# Altium PCB DistanceSensor.PcbDoc
Units mm, origin at the board's own origin, x right, y up, seen from the top; angles counter-clockwise.
Board outline 19 x 23 mm, 4 copper layers (L1 Top, L2 Ground, L3 Power, L4 Bottom), stack 1.576 mm thick; 21 components, 21 nets, 72 pads, 37 vias.
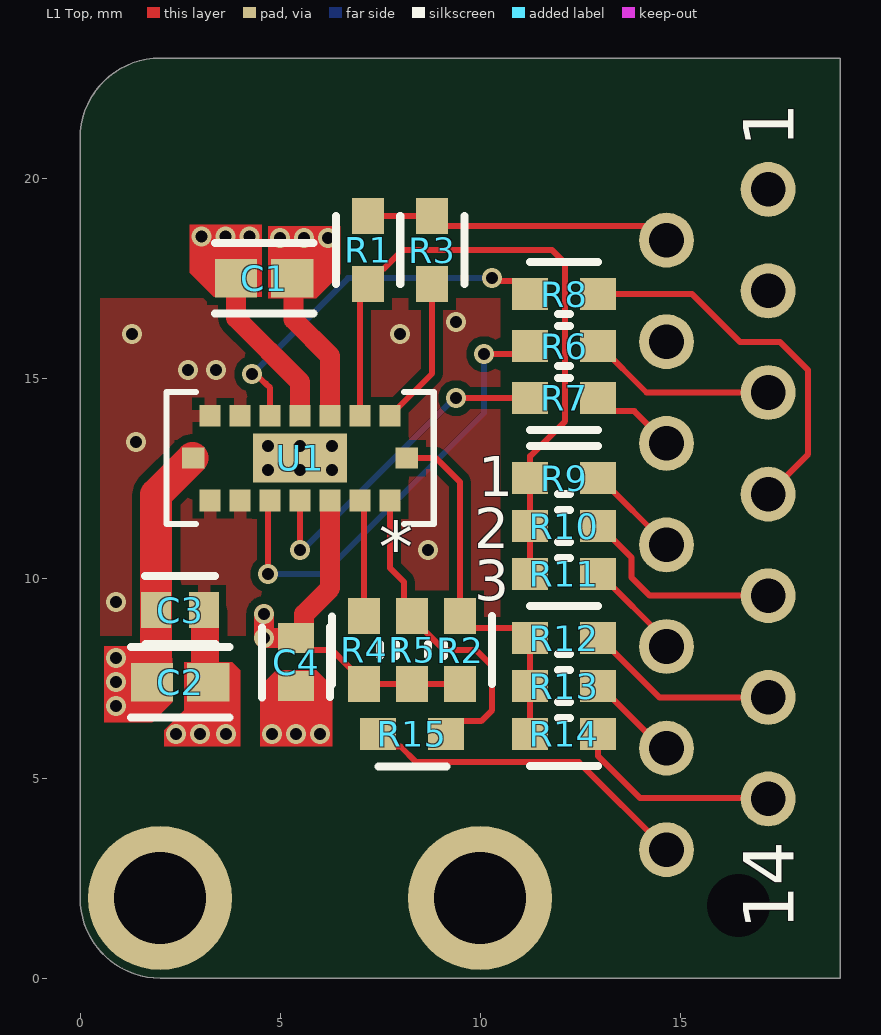
[diagram p0: L1 Top view]
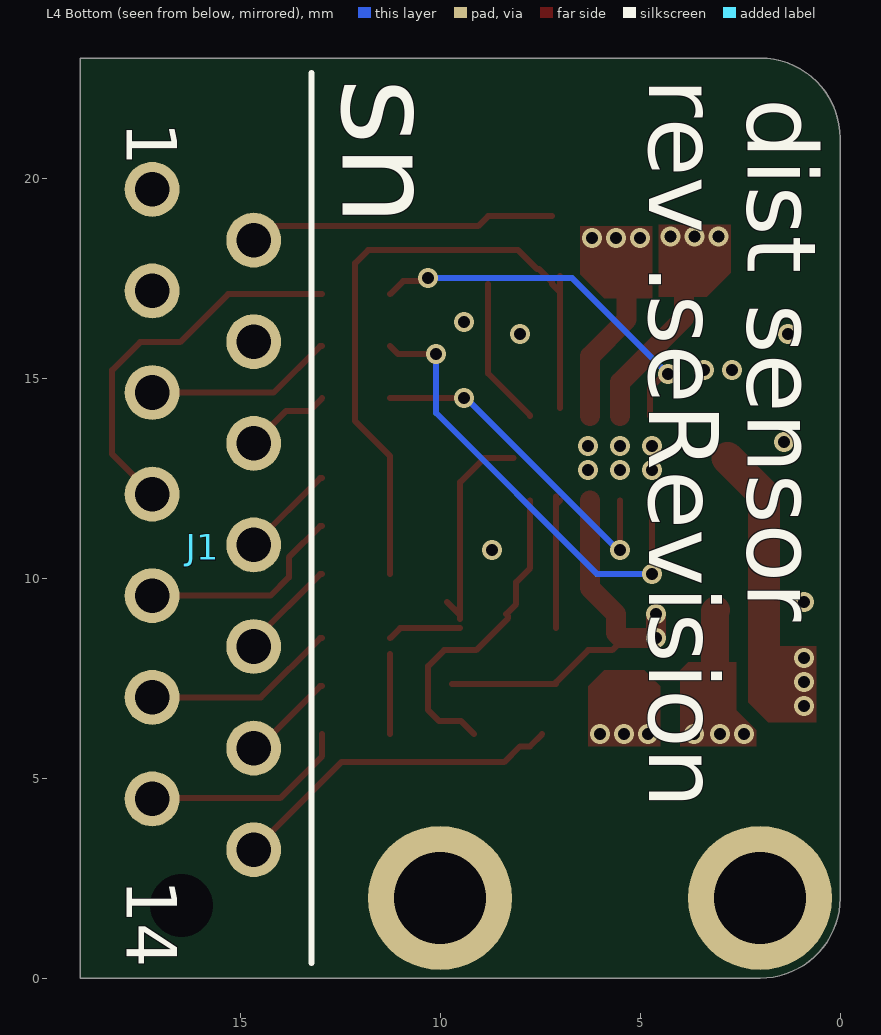
[diagram p1: L4 Bottom view, seen from below]
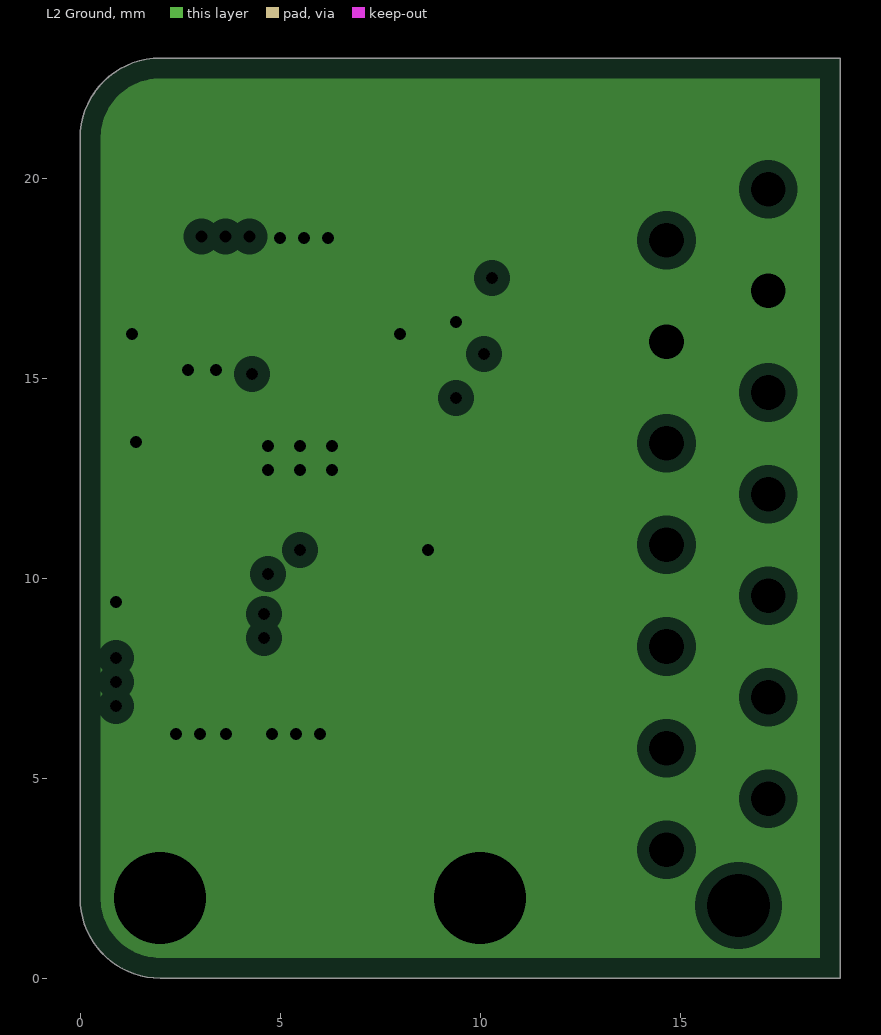
[diagram p2: L2 Ground, clearances drawn from the general rule]
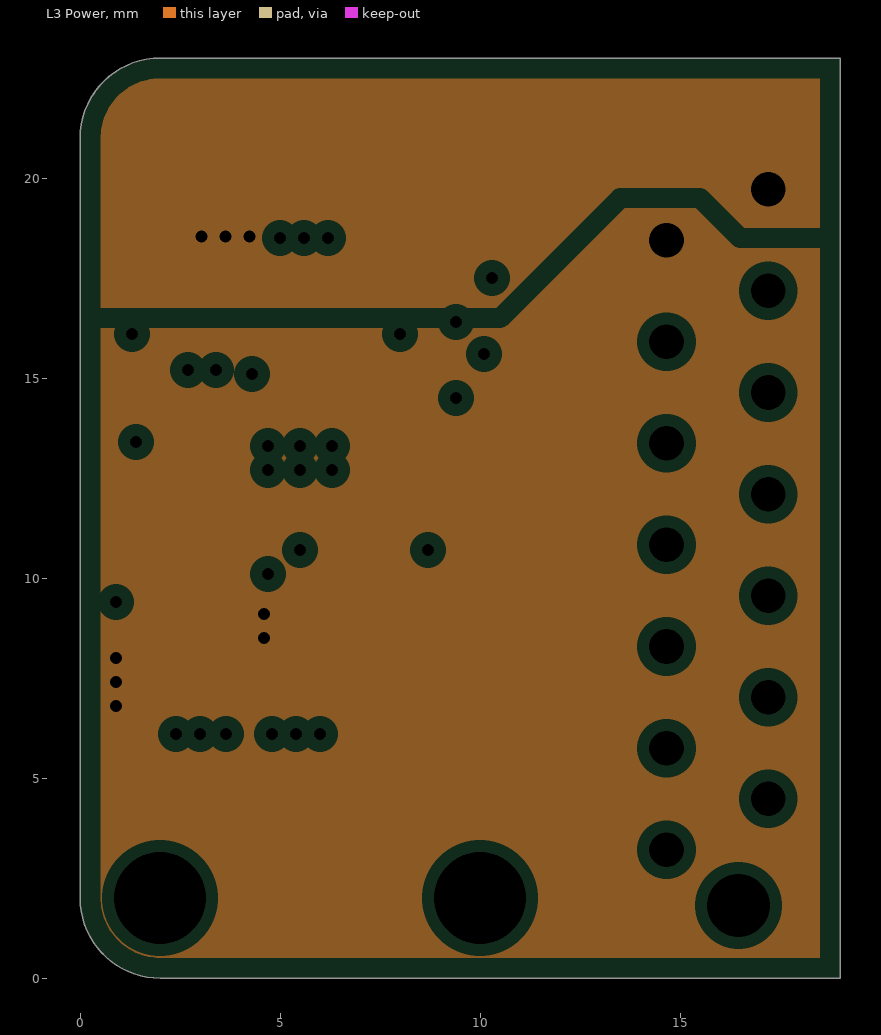
[diagram p3: L3 Power, clearances drawn from the general rule]
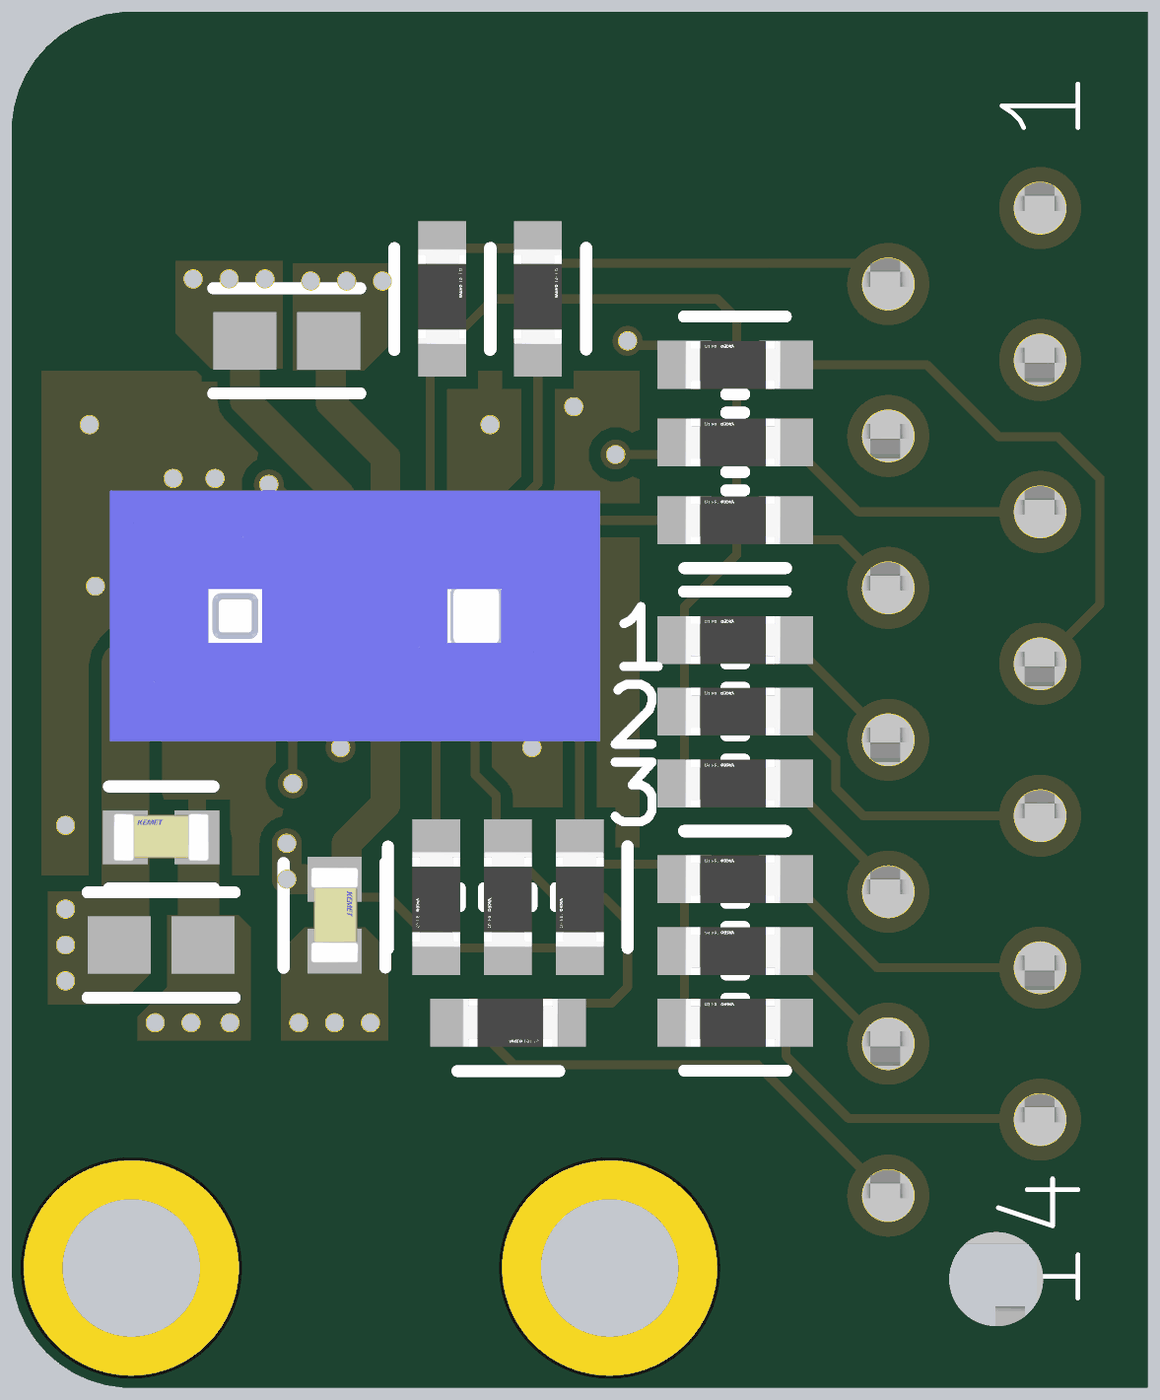
[diagram p4: 3D render of the assembled board from above, using the file's embedded part models]

## Layer stack, top to bottom
Top Solder: solder mask 0.0102, Solder Resist, Dk 3.5
L1 Top: signal copper 0.0356
Dielectric 2: prepreg 0.21, PP-006, Dk 4.1
L2 Ground: plane copper 0.0175, net GND
Dielectric 1: dielectric 1.05, FR-4, Dk 4.8
L3 Power: plane copper 0.0175, net 1.8V
Dielectric 3: prepreg 0.21, PP-006, Dk 4.1
L4 Bottom: signal copper 0.0356
Bottom Solder: solder mask 0.0102, Solder Resist, Dk 3.5

## Board outline
0,2 ccw(c2,2) 2,0 19,0 19,23 2,23 ccw(c2,21) 0,21

## Design rules (kind name [scope] priority, off if disabled: settings)
BoardOutlineClearance [All] p1: gap=0.4 ignorepadtopadclearanceinfootprint=FALSE
Clearance [All] p1: gap=0.1 ignorepadtopadclearanceinfootprint=FALSE except(0.2: Arc-Poly Track-Poly SMDPad-Poly THPad-Poly Via-Poly Fill-Poly Poly-Poly Poly-Region Poly-Text Poly-Hole)
ComponentClearance [All] p1: gap=0.35 collisioncheckmode=3 verticalgap=0.35 showdistances=FALSE
DiffPairsRouting DiffPairsRouting_ETH [InDifferentialPairClass('Ethernet')] p1: maxlimit=0.15 minlimit=0.15 mostfreqgap=0.15 toplayer_minwidth=0.132 toplayer_maxwidth=0.132 toplayer_prefwidth=0.132 bottomlayer_minwidth=0.132 bottomlayer_maxwidth=0.132 bottomlayer_prefwidth=0.132 impedanceprofiledriven=TRUE maxuncoupledlength=5
HoleSize [All] p1: absolutevalues=TRUE maxlimit=6.3 minlimit=0.3 maxpercent=80.000 minpercent=20.000
HoleToHoleClearance [All] p1: gap=0.3 allowstackedmicrovias=FALSE
MinimumAnnularRing [All] p1: minimumring=0.075
MinimumSolderMaskSliver [All] p1: minsoldermaskwidth=0.1
PlaneClearance [All] p1: clearance=0.3
PlaneConnect [All] p1: pad.planeconnectstyle=Relief pad.reliefexpansion=0.508 pad.reliefentries=4 pad.reliefconductorwidth=0.254 pad.reliefairgap=0.254 via.planeconnectstyle=Direct via.reliefexpansion=0.508 via.reliefentries=4 via.reliefconductorwidth=0.254 via.reliefairgap=0.254
PolygonConnect [All] p1: thpad.connectstyle=Relief thpad.reliefconductorwidth=0.3 thpad.reliefentries=4 thpad.polygonreliefangle="90 Angle" thpad.airgapwidth=0.18 smdpad.connectstyle=Relief smdpad.reliefconductorwidth=0.3 smdpad.reliefentries=4 smdpad.polygonreliefangle="90 Angle" smdpad.airgapwidth=0.18 via.connectstyle=Direct via.reliefconductorwidth=0.254 via.reliefentries=4 via.polygonreliefangle="90 Angle" via.airgapwidth=0.254
RoutingVias [All] p1: holewidth=0.3 width=0.46 viastyle="Through Hole" minholewidth=0.3 minwidth=0.45 maxholewidth=6 maxwidth=6.3
SilkToSilkClearance [All] p1: silktosilkclearance=0.15
SilkToSolderMaskClearance [IsPad] p1: minsilkscreentomaskgap=0.15 clearancetoexposedcopper=TRUE
SolderMaskExpansion [All] p1: expansion=0.05 istentingtop=FALSE
Width [All] p1: maxlimit=5 minlimit=0.1 preferedwidth=0.2 minimp=50.000000 maximp=50.000000 favimp=50.000000
21 further rules are at their usual default settings.

## Components (designator, comment, footprint, x,y, rotation, side; value= is the part's Value field where it differs from the comment)
C1 "GRM188Z71A475ME15D" FP-GRM188-0_15-IPC_B 4.6,17.5 r180 top
C2 "GRM188Z71A475ME15D" FP-GRM188-0_15-IPC_B 2.5,7.4 r180 top
C3 "C0603C104M5RACTU" FP-C0603C-CF-MFG 2.5,9.2 r0 top value="0.10 μF"
C4 "C0603C104M5RACTU" FP-C0603C-CF-MFG 5.4,7.9 r270 top value="0.10 μF"
J1 "1-338068-4" CONN_1-338068-4_TYC 17.2,19.72 r270 bottom
R1 "RT0603FRE0747KL" FP-RT0603-MFG 7.2,18.2 r90 top value=47KΩ
R2 "RT0603FRE0747KL" FP-RT0603-MFG 9.5,8.2 r270 top value=47KΩ
R3 "RT0603FRE0747KL" FP-RT0603-MFG 8.8,18.2 r90 top value=47KΩ
R4 "RT0603FRE0747KL" FP-RT0603-MFG 7.1,8.2 r270 top value=47KΩ
R5 "RT0603FRE0747KL" FP-RT0603-MFG 8.3,8.2 r270 top value=47KΩ
R6 "RT0603FRE0722RL" FP-RT0603-MFG 12.1,15.8 r180 top value=22Ω
R7 "RT0603FRE0722RL" FP-RT0603-MFG 12.1,14.5 r180 top value=22Ω
R8 "RT0603FRE0722RL" FP-RT0603-MFG 12.1,17.1 r180 top value=22Ω
R9 "RT0603FRE0722RL" FP-RT0603-MFG 12.1,12.5 r180 top value=22Ω
R10 "RT0603FRE0722RL" FP-RT0603-MFG 12.1,11.3 r180 top value=22Ω
R11 "RT0603FRE0722RL" FP-RT0603-MFG 12.1,10.1 r180 top value=22Ω
R12 "RT0603FRE0722RL" FP-RT0603-MFG 12.1,8.5 r180 top value=22Ω
R13 "RT0603FRE0722RL" FP-RT0603-MFG 12.1,7.3 r180 top value=22Ω
R14 "RT0603FRE0722RL" FP-RT0603-MFG 12.1,6.1 r180 top value=22Ω
R15 "RT0603FRE0722RL" FP-RT0603-MFG 8.3,6.1 r0 top value=22Ω
U1 "VL53L8CXV0GC/1" IC17_LGA16_STM 5.5,13 r0 top

## Footprints (in the part's own frame and the unit in brackets; to place one, negate y for a bottom-side part, rotate by r counter-clockwise, add the part's x,y. Pads: shape width x height; smd on the part's side, far side on the other; paste and mask are expansions set on the pad)
CONN_1-338068-4_TYC [mil]
  round 54 / inner round 60 / far side round 54 hole 34 paste-99999 mask-27: 1(0,0) 2(50,100) 3(100,0) 4(150,100) 5(200,0) 6(250,100) 7(300,0) 8(350,100) 9(400,0) 10(450,100) 11(500,0) 12(550,100) 13(600,0) 14(650,100)
  round 59.06 hole 62 unplated paste-99999 mask-41: ""(705,29)
  silkscreen extent -114,157 762,157, body extent -116,-47 760,150, height 157
FP-C0603C-CF-MFG [mm]
  rect 0.75x0.9 smd paste+0 mask+0: 1(-0.6,0) 2(0.6,0)
  silkscreen extent -0.87,-0.85 0.88,0.85, body extent -1.2,-0.6 1.2,0.6, height 0.25
FP-GRM188-0_15-IPC_B [mm]
  rect 1.056x0.958 smd paste+0 mask+0: 1(-0.701,0) 2(0.701,0)
  silkscreen extent -1.23,-0.88 1.23,0.88
FP-RT0603-MFG [mm]
  rect 0.9x0.8 smd paste+0 mask+0: 1(-0.85,0) 2(0.85,0)
  silkscreen extent -0.85,-0.81 0.86,0.8, body extent -1.4,-0.55 1.4,0.55, height 0.25
IC17_LGA16_STM [mm]
  rect 0.53x0.545 smd paste+0 mask+0: A1(2.25,-1.058) A2(1.5,-1.058) A3(0.75,-1.058) A4(0,-1.058) A5(-0.75,-1.058) A6(-1.5,-1.058) A7(-2.25,-1.058) C1(2.25,1.058) C2(1.5,1.058) C3(0.75,1.058) C4(0,1.058) C5(-0.75,1.058) C6(-1.5,1.058) C7(-2.25,1.058)
  rect 0.565x0.53 smd paste+0 mask+0: B1(2.668,0) B7(-2.668,0)
  rect 2.346x1.23 smd paste+0 mask+0: B4(0,0)
  silkscreen extent -3.34,-1.65 3.34,1.65, body extent -3.86,-2.2 4.34,2, height 4.75

## Part data
C1 C2: library part CMP-06035-024346-1, "Chip Multilayer Ceramic Capacitors for General Purpose, 0603, 4.7uF, X7R, 15%, 20%, 10V", Case/Package=0603, Parameter 1=4.7μF
C3 C4: library part CMP-2006-03068-2, "CAP CER 0.1UF 50V 20% X7R 0603", Capacitance="0.10 μF", Manufacturer=KEMET, Package=C0603C-CF, Temperature="-55°C to +125°C", Temperature Characteristic=X7R, Temperature Coefficient=30ppm/°C, Temperature Range High=+125°C, Temperature Range Low=-55°C, Tolerance=0.2, Voltage Rating="50 V", Automotive=Yes, Automotive Grade="Grade 1", Category=Cap, ComponentLink2Description=Datasheet, ComponentLink2URL=https://api.kemet.com/component-edge/download/datasheet/C0603C100J5GACAUTO.pdf, Device Class L1="Passive Components", Device Class L2=Capacitors, Device Class L3="Ceramic Capacitors", Digikey Description="CAP CER 0.1UF 50V 20% X7R 0603", Height=0.87mm, Lead Free=Yes, Manufacturer Part Number=C0603C104M5RACTU, Material=Ceramic, Mouser Description="Multilayer Ceramic Capacitors MLCC - SMD/SMT 50volts 0.1uF X7R 20%", Octopart=https://octopart.com/c0603c104m5ractu-kemet-11855687, RoHS=TRUE
J1: "MICRO-MATCH FTE,14P", Manufacturer_Name="TE Connectivity", Supplier Part Number 1=A99502CT-ND, Copyright="Copyright (C) 2025 Ultra Librarian. All rights reserved.", Datasheet=https://www.te.com/commerce/DocumentDelivery/DDEController?Action=srchrtrv&DocNm=4-1773457-1_050_Micro_MaTch&DocType=Data+Sheet&DocLang=English&PartCntxt=1-338068-4&DocFormat=pdf, Manufacturer_Part_Number=1-338068-4, RefDes=RefDes, Supplier 1=DigiKey, Supplier 2=DigiKey, Supplier 3=Mouser, Supplier Part Number 2=A99502TR-ND, Supplier Part Number 3=571-1-338068-4, Type=Type
R1 R2 R3 R4 R5: library part CMP-03412-008772-1, "RES 47.0K OHM 1/10W 1% SMD 0603", Manufacturer=Yageo, Package=RT0603, Power Rating=0.1W, Resistance=47KΩ, Temperature="-55°C to +155°C", Temperature Coefficient="50 ppm/°C", Temperature Range High=+155°C, Temperature Range Low=-55°C, Tolerance=0.01, Voltage Rating=75V, Automotive=No, Category=Res, ComponentLink2Description=Datasheet, ComponentLink2URL=http://www.yageo.com/documents/recent/PYu-RT_1-to-0.01_RoHS_L_9.pdf, Composition="Thin Film", Device Class L1="Passive Components", Device Class L2=Resistors, Device Class L3="Chip SMD Resistors", Digikey Description="RES 47.0K OHM 1/10W 1% SMD 0603", Footprint Url=http://www.yageo.com/exep/pages/download/literatures/PYu-R_Mount_10.pdf, Height=0.55mm, Ipc Land Pattern Name=RESC16080X45, Lead Free=Yes, Manufacturer Part Number=RT0603FRE0747KL, Mouser Description="High Precision-High Stability Chip Resistor Thin Film 0603 47kOhm 1% Paper T/R", Octopart=https://octopart.com/rt0603fre0747kl-yageo-40011881, RoHS=TRUE, Series=RT
R6 R7 R8 R9 R10 R11 R12 R13 R14 R15: library part CMP-03412-023299-1, "RES SMD 22 OHM 1% 1/10W 0603", Manufacturer=Yageo, Package=RT0603, Power Rating=0.1W, Resistance=22Ω, Temperature="-55°C to +155°C", Temperature Coefficient="50 ppm/°C", Temperature Range High=+155°C, Temperature Range Low=-55°C, Tolerance=0.01, Voltage Rating=75V, Automotive=No, Category=Res, ComponentLink2Description=Datasheet, ComponentLink2URL=http://www.yageo.com/documents/recent/PYu-RT_1-to-0.01_RoHS_L_9.pdf, Composition="Thin Film", Device Class L1="Passive Components", Device Class L2=Resistors, Device Class L3="Chip SMD Resistors", Digikey Description="RES SMD 22 OHM 1% 1/10W 0603", Footprint Url=http://www.yageo.com/exep/pages/download/literatures/PYu-R_Mount_10.pdf, Height=0.55mm, Ipc Land Pattern Name=RESC16080X45, Lead Free=Yes, Manufacturer Part Number=RT0603FRE0722RL, Mouser Description="High Precision-High Stability Chip Resistor Thin Film 0603 22Ohm 1% Paper T/R", Octopart=https://octopart.com/rt0603fre0722rl-yageo-39814074, RoHS=TRUE, Series=RT
U1: library part VL53L8CXV0GC1, "Low-power high-performance 8x8 multizone Time-of-Flight sensor (ToF)", Manufacturer_Name=STMicroelectronics, Supplier Part Number 1=4168721, Copyright="Copyright (C) 2025 Ultra Librarian. All rights reserved.", Manufacturer_Part_Number=VL53L8CXV0GC/1, RefDes=RefDes, Supplier 1=Farnell, Supplier 2=Farnell, Supplier 3=DigiKey, Supplier 4=DigiKey, Supplier 5=DigiKey, Supplier 6=Mouser, Supplier Part Number 2=4168721RL, Supplier Part Number 3=497-VL53L8CXV0GC/1CT-ND, Supplier Part Number 4=497-VL53L8CXV0GC/1DKR-ND, Supplier Part Number 5=497-VL53L8CXV0GC/1TR-ND, Supplier Part Number 6=511-VL53L8CXV0GC/1, Type=Type

## Free pads (board coordinates)
  round 3.6 hole 2.3: ""(2,2) ""(10,2)

## Via types
v1: diameter 0.5, hole 0.3, L1 Top to L4 Bottom, tented both sides, 31 vias
v2: diameter 0.5, hole 0.3, L1 Top to L4 Bottom, 6 vias

## Nets (pads, with @x,y where several pads share a name; then routed paths per layer and width w, separated by ;. In a path a pad name is that pad's centre, name@x,y a point inside that pad or via, vN(x,y) a via of type N, cw(c..) or ccw(c..) an arc to the next point about the centre after c; other vN are vias at no path point)
1.8V: C2.2 C3.1 C4.1 J1.2 R1.2 R2.2 R3.2 R4.2 R5.2 U1.A3 U1.B7 | length 23.8
  L1 Top w0.15: C4.1 5.7,8.2 6.3,8.2 7.1,7.4 R4.2 R5.2 R2.2 R2.2@9.7,7.35 ; R1.2 R3.2 9.05,18.8 14.31,18.8 J1.2
  L1 Top w0.5: U1.B7@2.815,13 U1.B7 ; v1(4.6,9.1) v1(4.6,8.5) C4.1 5.475,8.5 5.6,8.625 5.6,9.1 6.25,9.75 U1.A3
  L1 Top w0.8: C2.2 1.821,7.4 1.9,7.479 C3.1 1.9,12.085 U1.B7@2.815,13
  other v1: 0.9,6.8 0.9,7.4 0.9,8
3.3V: C1.2 J1.1 U1.C4 | length 4.2
  L1 Top w0.5: C1.2@3.934,17.535 C1.2 3.899,16.501 5.5,14.9 U1.C4
  other v1: 3.035,18.535 3.635,18.535 4.235,18.535
CS1: J1.8 R9.1 | length 2.4
  L1 Top w0.15: R9.1 13,12.5 14.66,10.84 J1.8
CS2: J1.9 R10.1 | length 5.3
  L1 Top w0.15: R10.1 13,11.3 13.783,10.517 13.783,10.017 14.24,9.56 J1.9
CS3: J1.10 R11.1 | length 2.5
  L1 Top w0.15: R11.1 13,10.1 14.66,8.44 J1.10
GND: C1.1 C2.1 C3.2 C4.2 J1.3 J1.4 pad. U1.A6 U1.A7 U1.B4 U1.C3 U1.C6 U1.C7 | length 5.7
  L1 Top w0.5: C1.1 5.336,17.465 5.336,16.464 6.25,15.55 U1.C3
  L1 Top w0.7: C3.2 3.125,9.175 3.125,7.476 C2.1
  other v1: 2.4,6.1 3,6.1 3.65,6.1 4.8,6.1 5.4,6.1 6,6.1 0.9,9.4 8.7,10.7 1.4,13.4 2.7,15.2 3.4,15.2 1.3,16.1 8,16.1 9.4,16.4 5,18.5 5.6,18.5 6.2,18.5
  other v2: 4.7,12.7 5.5,12.7 6.3,12.7 4.7,13.3 5.5,13.3 6.3,13.3
I\N\T\: J1.14 R15.1 | length 8.4
  L1 Top w0.15: R15.1 7.759,5.791 8.009,5.791 8.4,5.4 12.47,5.4 J1.14
MCLK: J1.5 R6.1 | length 4.7
  L1 Top w0.15: R6.1 13,15.8 14.16,14.64 J1.5
MISO: J1.7 R8.1 | length 9.6
  L1 Top w0.15: R8.1 15.3,17.1 16.5,15.9 17.5,15.9 18.2,15.2 18.2,13.1 J1.7
MOSI: J1.6 R7.1 | length 2.2
  L1 Top w0.15: R7.1 13.275,14.175 13.855,14.175 J1.6
NetR1_1: R1.1 R9.2 R10.2 R11.2 U1.C2 | length 17.2
  L1 Top w0.15: U1.C2@7,14.258 R1.1@7,17.55 ; R1.1@7,17.15 R1.1 7.2,17.4 7.525,17.725 7.575,17.725 8.05,18.2 11.8,18.2 12.125,17.875 12.125,13.925 11.25,13.05 R9.2 R10.2 R11.2
NetR2_1: R2.1 R12.2 R13.2 R14.2 U1.B1 | length 9.5
  L1 Top w0.15: U1.B1 8.9,13 9.5,12.4 R2.1@9.5,8.975 ; R2.1@9.5,8.75 11,8.75 R12.2 ; R2.1 9.5,9.075 R2.1@9.6,9.175 ; R2.1@9.5,9.275 R2.1@9.6,9.175 ; R2.1@9.825,9.4 R2.1@9.6,9.175 ; R14.2 11.25,8.1
NetR3_1: R3.1 U1.C1 | length 3.7
  L1 Top w0.15: U1.C1 7.75,14.065 8.8,15.115 R3.1
NetR4_1: R4.1 U1.A2 | length 3.4
  L1 Top w0.15: U1.A2 U1.A2@7.1,11.843 ; R4.1@7.1,8.75 U1.A2@7.1,12.043
NetR5_1: R5.1 R15.2 U1.A1 | length 8.1
  L1 Top w0.15: U1.A1 7.75,10.25 8.1,9.9 8.1,9.35 R5.1@8.35,9.1 ; R5.1 8.3,9 9.1,8.2 9.9,8.2 10.3,7.8 10.3,6.7 10.025,6.425 9.475,6.425 R15.2
NetR6_2: R6.2 U1.A5 | length 11.6
  L1 Top w0.15: v1(4.7,10.1) 4.7,11.893 U1.A5 ; v1(10.1,15.6) 11.05,15.6 R6.2
  L4 Bottom w0.15: v1(4.7,10.1) 6.072,10.1 10.1,14.128 v1(10.1,15.6)
NetR7_2: R7.2 U1.A4 | length 8.6
  L1 Top w0.15: v1(5.5,10.7) U1.A4 ; v1(9.4,14.5) R7.2
  L4 Bottom w0.15: v1(5.5,10.7) 5.55,10.7 9.35,14.5 v1(9.4,14.5)
NetR8_2: R8.2 U1.C5 | length 9.4
  L1 Top w0.15: v1(4.3,15.1) 4.395,15.1 4.633,14.861 4.644,14.861 4.75,14.755 U1.C5 ; v1(10.3,17.5) 10.395,17.5 10.47,17.425 10.925,17.425 R8.2
  L4 Bottom w0.15: v1(4.3,15.1) 6.7,17.5 v1(10.3,17.5)
SYNC1: J1.11 R12.1 | length 4.9
  L1 Top w0.15: R12.1 13,8.5 14.48,7.02 J1.11
SYNC2: J1.12 R13.1 | length 2.4
  L1 Top w0.15: R13.1 13,7.3 14.55,5.75 J1.12
SYNC3: J1.13 R14.1 | length 5.2
  L1 Top w0.15: R14.1 12.95,5.55 14,4.5 17.18,4.5 J1.13
pads on no net: J1.

## Polygon pours and split planes (outlines as drawn)
GND on L1 Top "GND_L01_P004" (solid, remove dead copper, pour order 4): 0.5,17 10.5,17 10.5,8.562 0.5,8.562
GND on L2 Ground (split plane): 2,22.49 18.49,22.49 18.49,0.51 2,0.51 1.985,0.509 1.833,0.518 1.668,0.546 1.507,0.592 1.353,0.656 1.206,0.737 1.07,0.834 0.945,0.945 0.834,1.07 0.737,1.206 0.656,1.353 0.592,1.507 0.546,1.668 0.518,1.833 0.509,1.985 0.51,2 0.51,21 0.509,21.015 0.518,21.167 0.546,21.332 0.592,21.493 0.656,21.647 0.737,21.794 0.834,21.93 0.945,22.055 1.07,22.166 1.206,22.263 1.353,22.344 1.507,22.408 1.668,22.454 1.833,22.482 1.985,22.491
3.3V on L3 Power (split plane): 2,22.49 18.49,22.49 18.49,18.752 16.604,18.752 15.678,19.678 15.626,19.718 15.565,19.744 15.5,19.752 13.5,19.752 13.435,19.744 13.374,19.718 13.344,19.696 13.322,19.678 10.396,16.752 0.51,16.752 0.51,21 0.509,21.015 0.518,21.167 0.546,21.332 0.592,21.493 0.656,21.647 0.737,21.794 0.834,21.93 0.945,22.055 1.07,22.166 1.206,22.263 1.353,22.344 1.507,22.408 1.668,22.454 1.833,22.482 1.985,22.491
1.8V on L3 Power (split plane): 16.322,18.322 16.374,18.282 16.435,18.256 16.5,18.248 18.49,18.248 18.49,0.51 2,0.51 1.985,0.509 1.833,0.518 1.668,0.546 1.507,0.592 1.353,0.656 1.206,0.737 1.07,0.834 0.945,0.945 0.834,1.07 0.737,1.206 0.656,1.353 0.592,1.507 0.546,1.668 0.518,1.833 0.509,1.985 0.51,2 0.51,16.248 10.5,16.248 10.565,16.256 10.626,16.282 10.678,16.322 13.604,19.248 15.396,19.248

## Other copper
L1 Top:
  region net 3.3V: 3.335,17.035 2.735,17.635 2.735,18.835 4.535,18.835 4.535,17.035
  region net GND: 3.8,7.9 4,7.7 4,5.8 2.1,5.8 2.1,6.2 2.6,6.7 2.6,7.9
  region net 1.8V: 2.3,8 2,8.3 0.6,8.3 0.6,6.4 1.8,6.4 2.3,6.9
  pour cut-out: 3.3,13.8 3.3,12.4 7.7,12.4 7.7,13.8
  region net GND: 5.9,17 6.5,17.6 6.5,18.8 4.7,18.8 4.7,17
  region net GND: 5.9,7.7 6.3,7.3 6.3,5.8 4.5,5.8 4.5,7.3 4.9,7.7
L3 Power (plane layer: these items are gaps in the copper):
  lines w0.5: 0,16.5 10.5,16.5 13.5,19.5 15.5,19.5 16.5,18.5 19,18.5

## Silkscreen, mask and mechanical layers (free items; w line width, h text height)
Top Overlay:
  text "1" at 9.95,12.05 h1
  text "2" at 9.85,10.75 h1
  text "3" at 9.85,9.45 h1
Bottom Overlay:
  text "rev .seRevision" at 5.342,22.5 h3 r90
  text "sn" at 13.2,22.5 h4 r90
  text "dist sensor" at 2.88,22 h3 r90
Mechanical 1:
  the board outline again, w0.1

## Text inside footprints (layer, text, board x,y; h text height)
J1: Top Overlay "14" at 17.835,1.203 h1.27 r90; Top Overlay "14" at 17.835,1.203 h1.27 r90; Top Overlay "1" at 17.835,20.774 h1.27 r90; Top Overlay "1" at 17.835,20.774 h1.27 r90; Bottom Overlay "14" at 17.835,2.473 h1.27 r90; Bottom Overlay "14" at 17.835,2.473 h1.27 r90; Bottom Overlay "1" at 17.835,21.409 h1.27 r90; Bottom Overlay "1" at 17.835,21.409 h1.27 r90; Bottom 3D Body "14" at 17.835,2.473 h1.27 r90; Bottom 3D Body "14" at 17.835,2.473 h1.27 r90; Bottom 3D Body "1" at 17.835,21.409 h1.27 r90; Bottom 3D Body "1" at 17.835,21.409 h1.27 r90
U1: Top 3D Body "*" at 8.154,11.298 h1.27; Top Overlay "*" at 7.468,10.155 h1.27